# EAGLE board CT_schematic (EAGLE 7.6.0)

Size 100 x 80 mm. Coordinates in mm from the lower left corner, seen from the top.
Outline: 0,0 100,0 100,80 0,80 0,0
Copper layers (1*16): Top 0.035mm / dielectric 1.5mm / Bottom 0.035mm
Design rules "default": minimum track width 10mil, minimum drill 24mil, track to track 8mil, track to pad 8mil, pad to pad 8mil, via to via 8mil, smd to smd 8mil, copper to edge 40mil, drill to drill 8mil, minimum pad ring 10mil, minimum via ring 8mil, stop-mask expansion 4mil, vias tented up to drill 0mil, thermal gap 10mil

## Footprints (pad centres in the part's own frame; a part is rotated, then mirrored left to right if it is on the bottom)
C0603 = smd 0.8 x 0.8: 1 -0.762,0; 2 0.762,0
C0402 = smd 0.5 x 0.5: 1 -0.508,0; 2 0.508,0
C1206 = smd 1.3 x 1.6: 1 -1.524,0; 2 1.524,0
C1210 = smd 1.2 x 2.5: 1 -1.524,0; 2 1.524,0
EXV-9H = smd 3.505 x 1.676: 1 -2.857,0; 2 2.857,0
L0603 = smd 0.8 x 0.8: 1 -0.762,0; 2 0.762,0
PJ-037B_PACKAGE = drill 3.7 square: 1 12,0 | drill 3.2 square: 2 6,0
R0603 = smd 0.8 x 0.8: 1 -0.762,0; 2 0.762,0
LQFP100 = smd 0.3 x 1.2: 1 -6,-7.75; 2 -5.5,-7.75; 3 -5,-7.75; 4 -4.5,-7.75; 5 -4,-7.75; 6 -3.5,-7.75; 7 -3,-7.75; 8 -2.5,-7.75; 9 -2,-7.75; 10 -1.5,-7.75; 11 -1,-7.75; 12 -0.5,-7.75; 13 0,-7.75; 14 0.5,-7.75; 15 1,-7.75; 16 1.5,-7.75; 17 2,-7.75; 18 2.5,-7.75; 19 3,-7.75; 20 3.5,-7.75; 21 4,-7.75; 22 4.5,-7.75; 23 5,-7.75; 24 5.5,-7.75; 25 6,-7.75; 51 6,7.75; 52 5.5,7.75; 53 5,7.75; 54 4.5,7.75; 55 4,7.75; 56 3.5,7.75; 57 3,7.75; 58 2.5,7.75; 59 2,7.75; 60 1.5,7.75; 61 1,7.75; 62 0.5,7.75; 63 0,7.75; 64 -0.5,7.75; 65 -1,7.75; 66 -1.5,7.75; 67 -2,7.75; 68 -2.5,7.75; 69 -3,7.75; 70 -3.5,7.75; 71 -4,7.75; 72 -4.5,7.75; 73 -5,7.75; 74 -5.5,7.75; 75 -6,7.75 | smd 1.2 x 0.3: 26 7.75,-6; 27 7.75,-5.5; 28 7.75,-5; 29 7.75,-4.5; 30 7.75,-4; 31 7.75,-3.5; 32 7.75,-3; 33 7.75,-2.5; 34 7.75,-2; 35 7.75,-1.5; 36 7.75,-1; 37 7.75,-0.5; 38 7.75,0; 39 7.75,0.5; 40 7.75,1; 41 7.75,1.5; 42 7.75,2; 43 7.75,2.5; 44 7.75,3; 45 7.75,3.5; 46 7.75,4; 47 7.75,4.5; 48 7.75,5; 49 7.75,5.5; 50 7.75,6; 76 -7.75,6; 77 -7.75,5.5; 78 -7.75,5; 79 -7.75,4.5; 80 -7.75,4; 81 -7.75,3.5; 82 -7.75,3; 83 -7.75,2.5; 84 -7.75,2; 85 -7.75,1.5; 86 -7.75,1; 87 -7.75,0.5; 88 -7.75,0; 89 -7.75,-0.5; 90 -7.75,-1; 91 -7.75,-1.5; 92 -7.75,-2; 93 -7.75,-2.5; 94 -7.75,-3; 95 -7.75,-3.5; 96 -7.75,-4; 97 -7.75,-4.5; 98 -7.75,-5; 99 -7.75,-5.5; 100 -7.75,-6
SOIC-8 = smd 1.6 x 0.6: 1 -2.7,1.905 | smd 1.55 x 0.6: 2 -2.7,0.635; 3 -2.7,-0.635; 4 -2.7,-1.905; 5 2.7,-1.905; 6 2.7,-0.635; 7 2.7,0.635; 8 2.7,1.905
MBH7BLZ02-109004 = smd 0.5 x 0.5: 1 0,0; 15 9.85,0; 27 9.85,8.45; 41 0,8.45 | smd 0.45 x 0.5: 2 0.725,0; 3 1.425,0; 4 2.125,0; 5 2.825,0; 6 3.525,0; 7 4.225,0; 8 4.925,0; 9 5.625,0; 10 6.325,0; 11 7.025,0; 12 7.725,0; 13 8.425,0; 14 9.125,0 | smd 0.5 x 0.45: 16 9.85,0.725; 17 9.85,1.425; 18 9.85,2.125; 19 9.85,2.825; 20 9.85,3.525; 21 9.85,4.225; 22 9.85,4.925; 23 9.85,5.625; 24 9.85,6.325; 25 9.85,7.025; 26 9.85,7.725; 28 9.15,8.45; 29 8.45,8.45; 30 7.75,8.45; 31 7.05,8.45; 32 6.35,8.45; 33 5.65,8.45; 34 4.95,8.45; 35 4.25,8.45; 36 3.55,8.45; 37 2.85,8.45; 38 2.15,8.45; 39 1.45,8.45; 40 0.75,8.45; 42 0,7.75; 43 0,7.05; 44 0,6.35; 45 0,5.65; 46 0,4.95; 47 0,4.25; 48 0,3.55; 49 0,2.85; 50 0,2.15; 51 0,1.45; 52 0,0.75 | smd 3 x 2.5: 53 3.225,2.775; 54 6.625,2.775; 55 6.625,5.675; 56 3.225,5.675
182-009-MALE = drill 1.194 pad 1.524 octagon: 1 -5.537,10.923; 2 -2.769,10.923; 3 0,10.923; 4 2.769,10.923; 5 5.537,10.923; 6 -4.153,8.08; 7 -1.384,8.08; 8 1.384,8.08; 9 4.153,8.08 | hole 3.048: -12.446,9.501; 12.446,9.501
WNG008 = smd 0.45 x 0.55: 1 -1.27,0; 2 0,0; 3 1.27,0; 4 2.54,0; 5 2.54,7.5; 6 1.27,7.5; 7 0,7.5; 8 -1.27,7.53 | smd 4.9 x 4.75: PAD 0.635,3.75
MICRO_USB_AB = smd 0.4 x 1.35: 1 1.3,0.26; 2 0.65,0.26; 3 0,0.26; 4 -0.65,0.26; 5 -1.3,0.26 | drill 0.6 pad 0.95 long: 6 4.175,-2.54; 7 -4.175,-2.54 | drill 0.7 pad 1.1 long: 8 -2.225,0.46; 9 2.225,0.46
SOT143B = smd 1 x 0.7: 1 -0.75,-1 | smd 0.6 x 0.7: 2 0.95,-1; 3 0.95,1; 4 -0.95,1
ABLS-25.000MHZ-B2F-T = smd 5.6 x 2.8: 1 -3.81,0; 2 5.69,0
ASEK = smd 1.4 x 1: 1 -1.1,-0.8; 2 1.1,-0.8; 3 1.1,0.8; 4 -1.1,0.8
WSON-8 = smd 0.3 x 0.6: 1 -0.75,0; 2 0.05,0; 3 0.85,0; 4 1.65,0; 5 1.65,3.8; 6 0.85,3.8; 7 0.05,3.8; 8 -0.75,3.8 | smd 3 x 2.6: PAD 0.45,1.9
SON-6 = smd 0.55 x 0.3: 1 -0.355,0.5 | smd 0.52 x 0.3: 2 -0.37,0; 3 -0.37,-0.5; 4 0.37,-0.5; 5 0.37,0; 6 0.37,0.5
SW_4-1437565-2 = smd 1.4 x 2.1: 1 -2.23,4.55; 2 -2.23,-4.55; 3 2.23,4.55; 4 2.23,-4.55
LGM67K-G1J2-24-Z = smd 0.8 x 1.4: A -2,0; C 0,0
NC7SZ125M5X = smd 1.3 x 0.7: 1 -1.3,0.95; 2 -1.3,0; 3 -1.3,-0.95; 4 1.3,-0.95; 5 1.3,0.95

## Placement (x,y rotation side)
C1  1e-06  [C0603]  -48.26,73.66 0 top  (outside the outline)
C2  1e-07  [C0603]  -52.07,73.66 0 top  (outside the outline)
C3  1e-07  [C0603]  -55.88,73.66 0 top  (outside the outline)
C4  1e-07  [C0603]  -59.69,73.66 0 top  (outside the outline)
C5  1e-07  [C0603]  -63.5,73.66 0 top  (outside the outline)
C6  1e-07  [C0603]  -67.31,73.66 0 top  (outside the outline)
C7  1e-07  [C0603]  -71.12,73.66 0 top  (outside the outline)
C8  4.7e-06  [C0603]  -44.45,73.66 0 top  (outside the outline)
C9  1e-08  [C0603]  -74.93,73.66 0 top  (outside the outline)
C10  1e-06  [C0603]  -78.74,73.66 0 top  (outside the outline)
C11  1e-11  [C0402]  -57.15,78.74 0 top  (outside the outline)
C12  1e-11  [C0402]  -60.96,78.74 0 top  (outside the outline)
C13  1e-08  [C0402]  -64.77,78.74 0 top  (outside the outline)
C14  1e-07  [C0402]  -68.58,78.74 0 top  (outside the outline)
C15  1e-07  [C0402]  -72.39,78.74 0 top  (outside the outline)
C16  1e-06  [C0603]  -15.24,78.74 0 top  (outside the outline)
C17  1e-06  [C0603]  -19.05,78.74 0 top  (outside the outline)
C18  1e-08  [C0402]  -76.2,78.74 0 top  (outside the outline)
C19  1e-08  [C0402]  -80.01,78.74 0 top  (outside the outline)
C20  1e-08  [C0402]  -15.24,83.82 0 top  (outside the outline)
C21  1e-05  [C1206]  -16.51,67.31 0 top  (outside the outline)
C22  1e-05  [C1210]  -71.12,60.96 0 top  (outside the outline)
C23  1e-06  [C0603]  -22.86,78.74 0 top  (outside the outline)
C24  1e-05  [C1210]  -77.47,60.96 0 top  (outside the outline)
C25  1e-07  [C0402]  -19.05,83.82 0 top  (outside the outline)
C26  0.0001  [EXV-9H]  -17.78,60.96 0 top  (outside the outline)
C27  0.0001  [EXV-9H]  -29.21,60.96 0 top  (outside the outline)
C28  1e-08  [C0402]  -22.86,83.82 0 top  (outside the outline)
C29  1e-08  [C0402]  -26.67,83.82 0 top  (outside the outline)
F1  240.0  [L0603]  -26.67,78.74 0 top  (outside the outline)
J1  PJ-037B  [PJ-037B_PACKAGE]  -27.94,29.21 0 top  (outside the outline)
R2  1000.0  [R0603]  -30.48,78.74 0 top  (outside the outline)
R4  4700.0  [R0603]  -34.29,78.74 0 top  (outside the outline)
R5  4700.0  [R0603]  -38.1,78.74 0 top  (outside the outline)
R6  10000.0  [R0603]  -64.77,67.31 0 top  (outside the outline)
R7  10000.0  [R0603]  -69.85,67.31 0 top  (outside the outline)
R8  10000.0  [R0603]  -74.93,67.31 0 top  (outside the outline)
R9  10000.0  [R0603]  -15.24,73.66 0 top  (outside the outline)
R10  120.0  [R0603]  -41.91,78.74 0 top  (outside the outline)
R11  10000.0  [R0603]  -20.32,73.66 0 top  (outside the outline)
R12  10000.0  [R0603]  -25.4,73.66 0 top  (outside the outline)
R13  10000.0  [R0603]  -30.48,73.66 0 top  (outside the outline)
R14  100000.0  [R0603]  -34.29,67.31 0 top  (outside the outline)
R15  2231.0  [R0603]  -45.72,78.74 0 top  (outside the outline)
R16  1000.0  [R0603]  -49.53,78.74 0 top  (outside the outline)
R17  100000.0  [R0603]  -39.37,67.31 0 top  (outside the outline)
R18  300000.0  [R0603]  -44.45,67.31 0 top  (outside the outline)
R19  100000.0  [R0603]  -49.53,67.31 0 top  (outside the outline)
R20  10000.0  [R0603]  -35.56,73.66 0 top  (outside the outline)
R21  10000.0  [R0603]  -40.64,73.66 0 top  (outside the outline)
R22  9100.0  [R0603]  -53.34,78.74 0 top  (outside the outline)
R23  680000.0  [R0603]  -54.61,67.31 0 top  (outside the outline)
R24  120000.0  [R0603]  -59.69,67.31 0 top  (outside the outline)
U1  stm32f103vbt7  [LQFP100]  -62.23,8.89 0 top  (outside the outline)
U2  AT25160B-SSHL-T  [SOIC-8]  -62.23,40.64 0 top  (outside the outline)
U3  MBH7BLZ02-109004  [MBH7BLZ02-109004]  -52.07,24.13 0 top  (outside the outline)
U4  MCP2562-E/SN  [SOIC-8]  -76.2,40.64 0 top  (outside the outline)
U5  182-009-113R531  [182-009-MALE]  -36.83,6.35 0 top  (outside the outline)
U6  S25FL128SDPNFI001  [WNG008]  -48.26,39.37 0 top  (outside the outline)
U7  47590-0001  [MICRO_USB_AB]  -60.96,30.48 0 top  (outside the outline)
U8  prtr5v0u2ax  [SOT143B]  -39.37,83.82 0 top  (outside the outline)
U9  ABLS-25.000MHZ-B2F-T  [ABLS-25.000MHZ-B2F-T]  -48.26,60.96 0 top  (outside the outline)
U10  ASEK-32.768KHz-ECST  [ASEK]  -67.31,52.07 0 top  (outside the outline)
U11  LP3878SDX-ADJ/NOPB  [WSON-8]  -30.48,50.8 0 top  (outside the outline)
U12  LP2951ACSDX/NOPB  [WSON-8]  -48.26,50.8 0 top  (outside the outline)
U13  TPS3895ADRYR  [SON-6]  -43.18,82.55 0 top  (outside the outline)
U14  4-1437565-2  [SW_4-1437565-2]  -27.94,41.91 0 top  (outside the outline)
U15  Q65110A2395  [LGM67K-G1J2-24-Z]  -59.69,60.96 0 top  (outside the outline)
U16  nc7sz125m5x  [NC7SZ125M5X]  -21.59,67.31 0 top  (outside the outline)
U17  nc7sz125m5x  [NC7SZ125M5X]  -27.94,67.31 0 top  (outside the outline)

## Library data of the parts
C1-C29 F1 J1 R2 R4-R24 U1-U17 = circuit_tree

## Nets
CLK_CRYSTAL_U1_12: C11.1 U1.12 U9.1
CLK_CRYSTAL_U1_13: C12.1 U1.13 U9.2
CLK_U1_8: U1.8 U10.3
GND: C1.2 C2.2 C3.2 C4.2 C5.2 C6.2 C7.2 C8.2 C9.2 C10.2 C11.2 C12.2 C13.2 C14.2 C15.2 C16.2 C17.2 C18.2 C19.2 C20.2 C21.2 C22.2 C23.2 C24.2 C25.2 C26.2 C27.2 C28.2 C29.2 J1.2 R2.2 R6.2 R16.2 R19.2 R22.2 R24.2 U1.10 U1.19 U1.20 U1.27 U1.49 U1.74 U1.99 U2.4 U3.1 U3.3 U3.15 U3.27 U3.29 U3.41 U3.42 U3.43 U3.44 U3.45 U3.46 U3.47 U3.48 U3.49 U3.50 U3.52 U3.53 U3.54 U3.55 U3.56 U4.2 U4.8 U5.5 U6.4 U6.PAD U7.5 U7.6 U7.7 U7.8 U7.9 U8.1 U10.2 U11.3 U11.PAD U12.3 U12.4 U12.PAD U13.2 U15.C U16.1 U16.3 U17.1 U17.3
NET_U1_14: R5.1 U1.14 U17.4
NET_U1_22: C9.1 C10.1 F1.1 U1.21 U1.22
NET_U1_94: R6.1 U1.94
NET_U1_97: U15.A
NET_U1_98: U14.3 U14.4
NET_U2_3: R7.1 U2.3
NET_U2_7: R9.1 U2.7
NET_U3_39: R4.1 U3.39 U16.4
NET_U4_6: R10.2 U4.6
NET_U5_2: R10.2 U4.6 U5.2
NET_U5_3: R10.1 U4.7 U5.3
NET_U6_3: R11.1 U6.3
NET_U6_7: R13.1 U6.7
NET_U8_4: U7.1 U8.4
NET_U11_1: C20.1 U11.1
NET_U11_6: R15.2 R16.1 U11.6
NET_U11_8: R14.1 U11.8
NET_U12_5: R17.1 U12.5
NET_U12_7: R18.2 R19.1 U12.7
NET_U13_1: R21.1 R22.1 U13.1
NET_U13_3: R23.2 R24.1 U13.3
NET_U13_4: R20.1 U13.4 U16.2 U17.2
NET_U14_1: R2.1 U14.1 U14.2
PROC_CAN_RX: U1.81 U4.4
PROC_CAN_TX: U1.82 U4.1
PROC_SPI1_MISO: U1.31 U6.2
PROC_SPI1_MOSI: U1.32 U6.5
PROC_SPI1_NSS: R12.1 U1.29 U6.1
PROC_SPI1_SCK: U1.30 U6.6
PROC_SPI2_MISO: U1.53 U2.2
PROC_SPI2_MOSI: U1.54 U2.5
PROC_SPI2_NSS: R8.1 U1.51 U2.1
PROC_SPI2_SCK: U1.52 U2.6
PROC_USART2_CTS: U1.23 U3.26
PROC_USART2_RTS: U1.24 U3.24
PROC_USART2_RX: U1.26 U3.25
PROC_USART2_TX: U1.25 U3.23
PROC_USB_DM: U1.70 U7.2 U8.3
PROC_USB_DP: U1.71 U7.3 U8.2
VCC_S1_8V5: C21.1 C23.1 C26.1 C27.1 J1.1 R14.2 U11.4 U12.8
VCC_TIER1_3V3: C1.1 C2.1 C3.1 C4.1 C5.1 C6.1 C7.1 C8.1 C13.1 C14.1 C15.1 C17.1 C18.1 C19.1 C22.1 C25.1 C28.1 C29.1 F1.2 R4.2 R5.2 R7.2 R8.2 R9.2 R11.2 R12.2 R13.2 R15.1 R20.2 R21.2 R23.1 U1.6 U1.11 U1.28 U1.50 U1.75 U1.100 U2.8 U3.28 U4.5 U6.8 U10.4 U11.5 U13.6 U16.5 U17.5
VCC_TIER1_5V0: C16.1 C24.1 R17.2 R18.1 U4.3 U12.1

## Tracks (layer width: path | path; a pad name or v marks a point on that pad's centre or on a via)
CLK_CRYSTAL_U1_12  (2 unrouted)
CLK_CRYSTAL_U1_13  (2 unrouted)
CLK_U1_8  (1 unrouted)
GND  (86 unrouted)
NET_U1_14  (2 unrouted)
NET_U1_22  (4 unrouted)
NET_U1_94  (1 unrouted)
NET_U1_98  (1 unrouted)
NET_U2_3  (1 unrouted)
NET_U2_7  (1 unrouted)
NET_U3_39  (2 unrouted)
NET_U4_6  (1 unrouted)
NET_U5_2  (2 unrouted)
NET_U5_3  (2 unrouted)
NET_U6_3  (1 unrouted)
NET_U6_7  (1 unrouted)
NET_U8_4  (1 unrouted)
NET_U11_1  (1 unrouted)
NET_U11_6  (2 unrouted)
NET_U11_8  (1 unrouted)
NET_U12_5  (1 unrouted)
NET_U12_7  (2 unrouted)
NET_U13_1  (2 unrouted)
NET_U13_3  (2 unrouted)
NET_U13_4  (3 unrouted)
NET_U14_1  (2 unrouted)
PROC_CAN_RX  (1 unrouted)
PROC_CAN_TX  (1 unrouted)
PROC_SPI1_MISO  (1 unrouted)
PROC_SPI1_MOSI  (1 unrouted)
PROC_SPI1_NSS  (2 unrouted)
PROC_SPI1_SCK  (1 unrouted)
PROC_SPI2_MISO  (1 unrouted)
PROC_SPI2_MOSI  (1 unrouted)
PROC_SPI2_NSS  (2 unrouted)
PROC_SPI2_SCK  (1 unrouted)
PROC_USART2_CTS  (1 unrouted)
PROC_USART2_RTS  (1 unrouted)
PROC_USART2_RX  (1 unrouted)
PROC_USART2_TX  (1 unrouted)
PROC_USB_DM  (2 unrouted)
PROC_USB_DP  (2 unrouted)
VCC_S1_8V5  (7 unrouted)
VCC_TIER1_3V3  (45 unrouted)
VCC_TIER1_5V0  (5 unrouted)